# Altium PCB spectral_clock.PcbDoc
Units mm, origin at the board's own origin, x right, y up, seen from the top; angles counter-clockwise.
Board outline 35.5 x 62 mm, 2 copper layers (Top Layer, Bottom Layer); 71 components, 66 nets, 277 pads, 180 vias.
Unrouted connection lines stored in the file: 10.
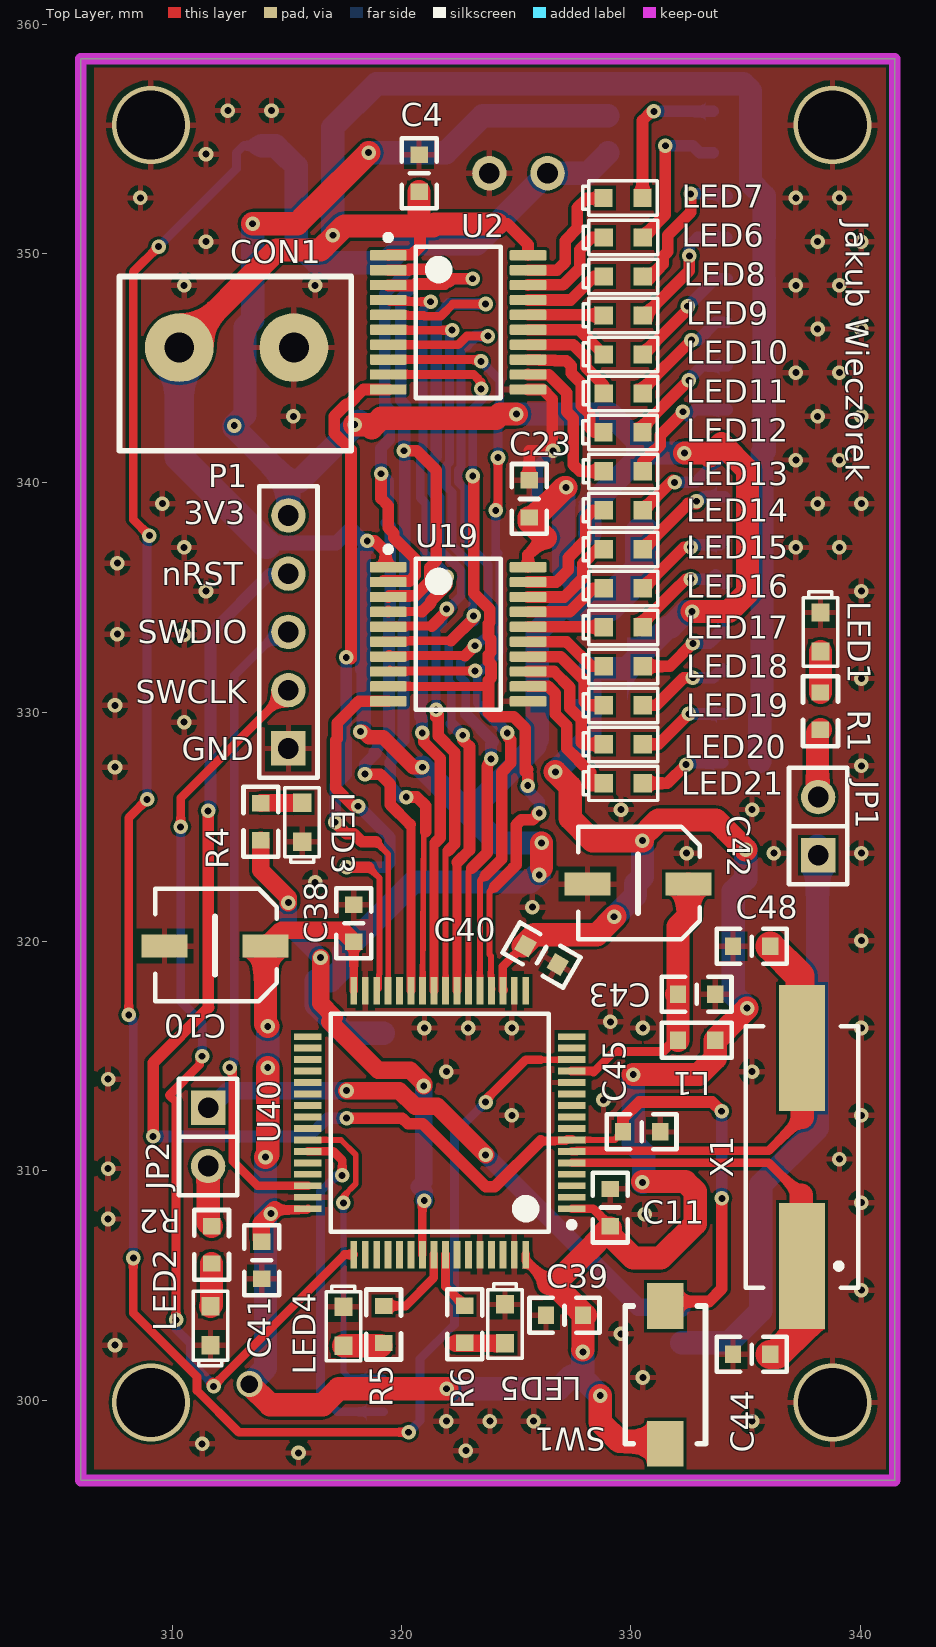
[diagram p0: Top Layer view]
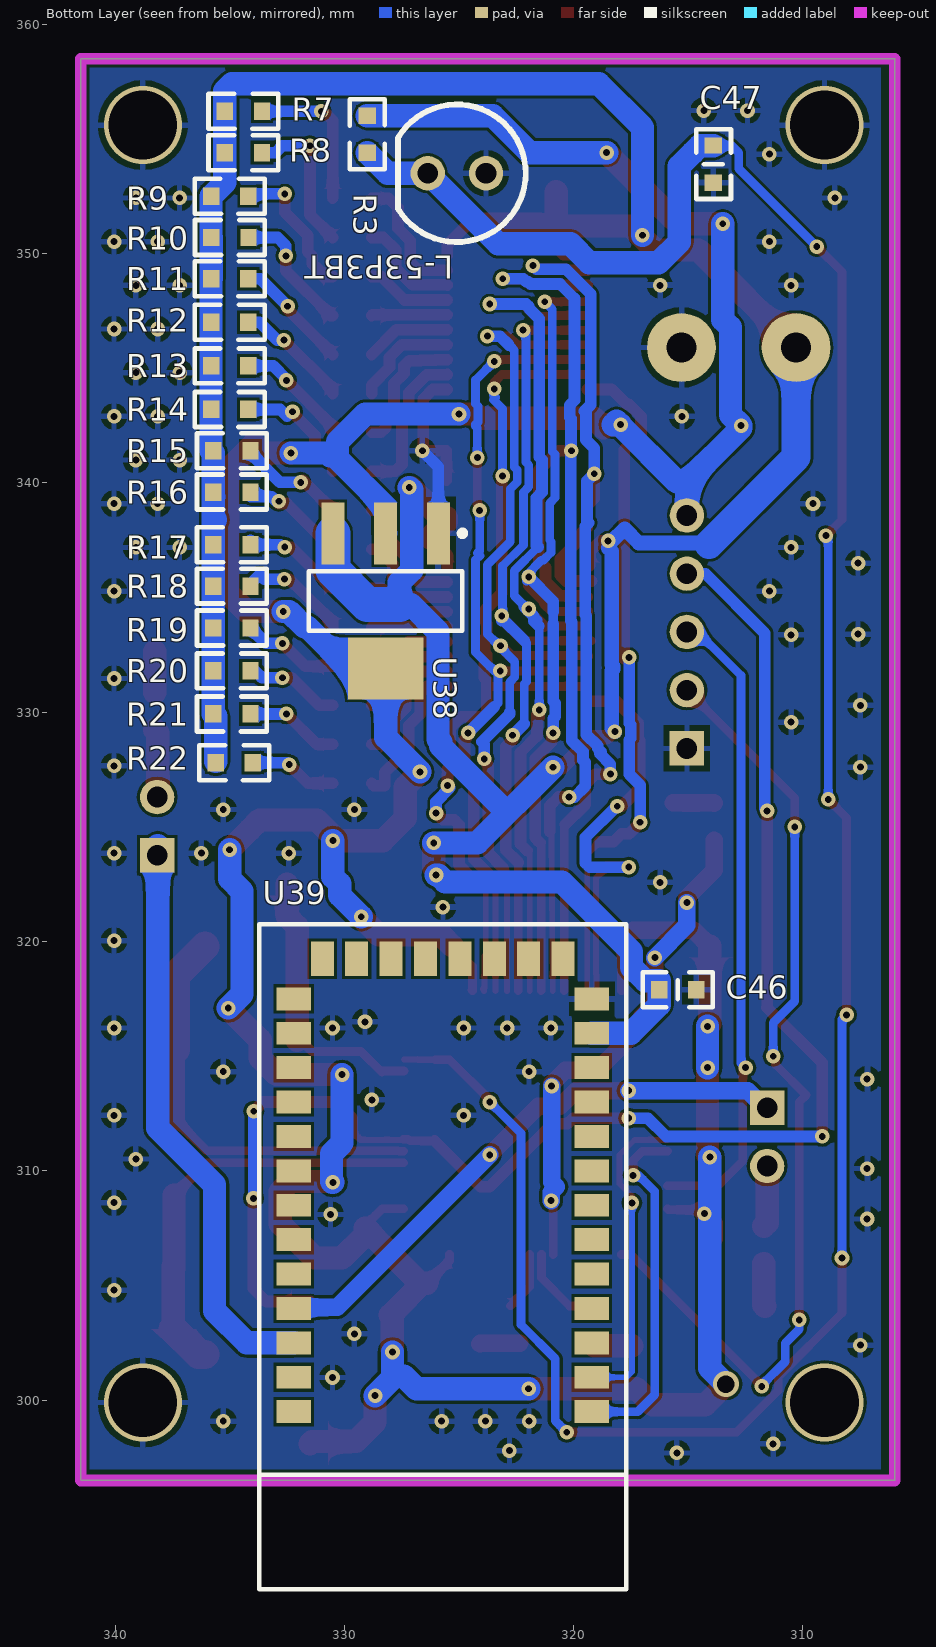
[diagram p1: Bottom Layer view, seen from below]
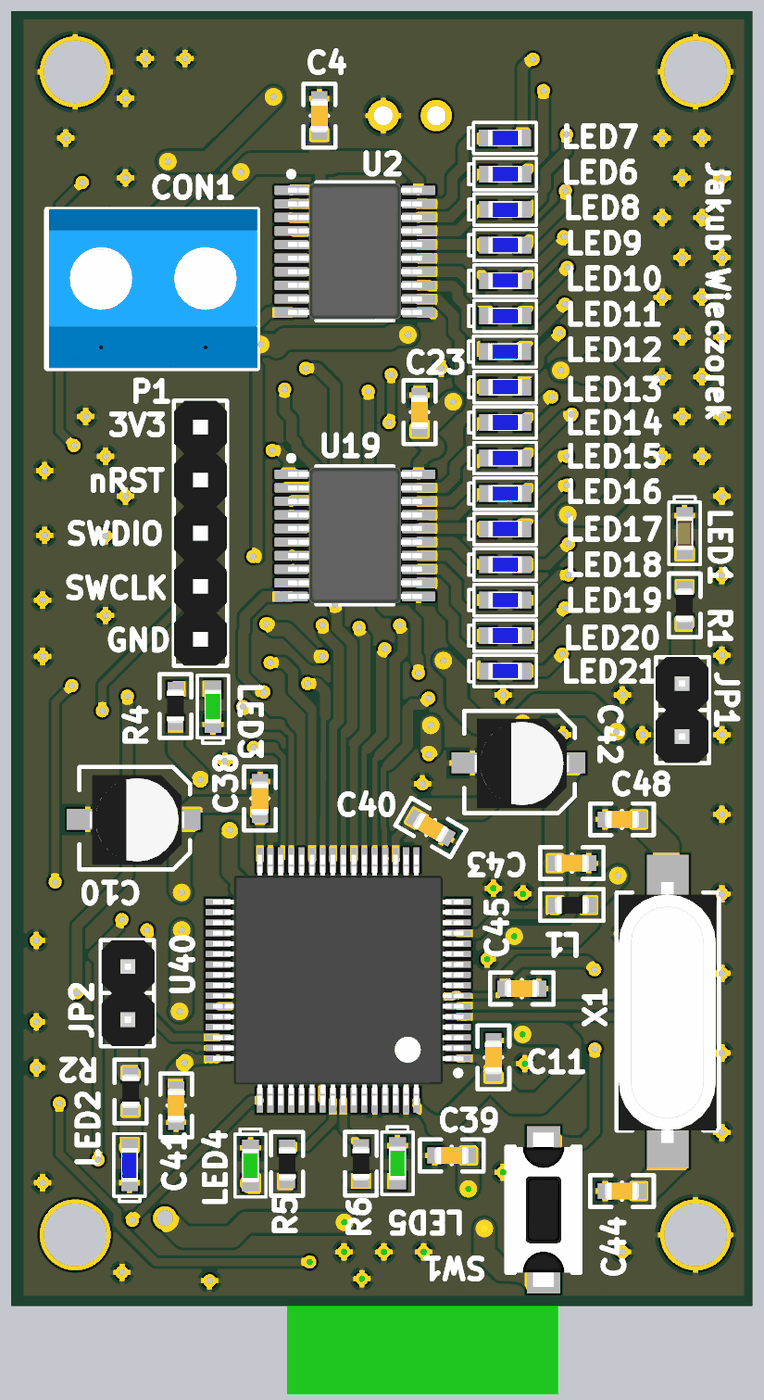
[diagram p2: 3D render of the assembled board from above, using the file's embedded part models]
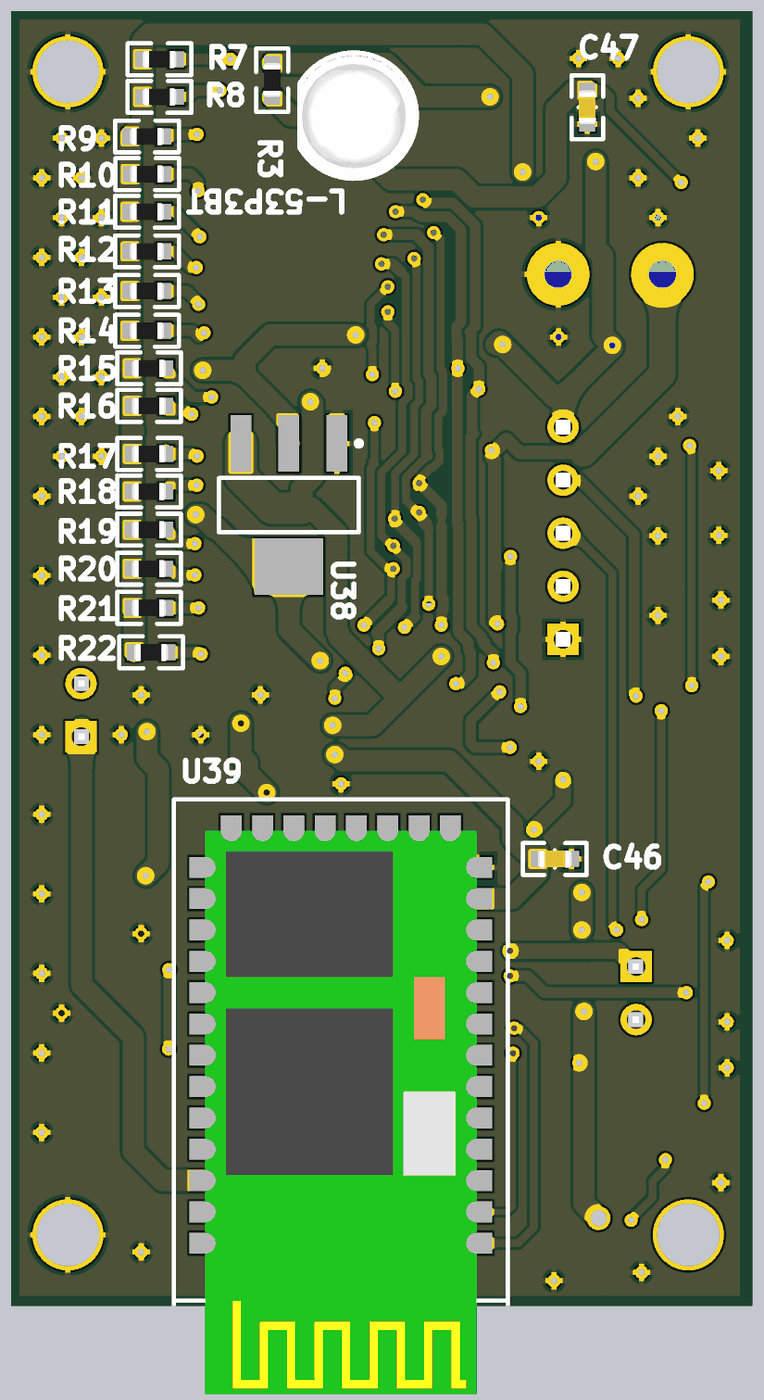
[diagram p3: 3D render of the assembled board from below, using the file's embedded part models]

## Layer stack, top to bottom
Top Solder: solder mask 0.0102, Solder Resist, Dk 3.5
Top Layer: signal copper 0.0356
Dielectric 1: dielectric 0.32, FR-4, Dk 4.8
Bottom Layer: signal copper 0.0356
Bottom Solder: solder mask 0.0102, Solder Resist, Dk 3.5

## Board outline
306,296.5 306,358.5 341.5,358.5 341.5,296.5

## Design rules (kind name [scope] priority, off if disabled: settings)
Clearance "Stitching GND" [IsStitchingVia and InNet('GND') vs (IsVia and (Not IsStitchingVia)) Or IsPad] p1: gap=0.127 ignorepadtopadclearanceinfootprint=FALSE
Clearance minimum_clearance [All] p2: gap=0.127 ignorepadtopadclearanceinfootprint=FALSE // minimum electrical clearance
DiffPairsRouting [All] p1: maxlimit=2.54 minlimit=0.127 mostfreqgap=0.254 toplayer_minwidth=0.127 toplayer_maxwidth=2.54 toplayer_prefwidth=0.762 bottomlayer_minwidth=0.127 bottomlayer_maxwidth=2.54 bottomlayer_prefwidth=0.762 maxuncoupledlength=12.7
HoleSize [All] p1: absolutevalues=TRUE maxlimit=6.5 minlimit=0.3 maxpercent=80.000 minpercent=20.000
MinimumAnnularRing [All] p1: minimumring=0.153
PolygonConnect [All] p1: connectstyle=Relief reliefconductorwidth=0.254 reliefentries=4 polygonreliefangle="90 Angle" airgapwidth=0.254
RoutingVias [All] p1: holewidth=1 width=1.45 viastyle="Through Hole" minholewidth=0.3 minwidth=0.45 maxholewidth=5 maxwidth=5.45
SilkToSilkClearance [All] p1: silktosilkclearance=0.125
SilkToSolderMaskClearance [IsPad] p1: minsilkscreentomaskgap=0.125 clearancetoexposedcopper=TRUE
SolderMaskExpansion [All] p1: expansion=0.102
UnRoutedNet [All] p1: checkbadconnections=TRUE
Width [All] p1: maxlimit=2.54 minlimit=0.127 preferedwidth=0.762 minimp=50.000000 maximp=50.000000 favimp=50.000000
25 further rules are at their usual default settings.

## Components (designator, comment, footprint, x,y, rotation, side; value= is the part's Value field where it differs from the comment)
C4 "Cap" 0603_CAP 320.761,353.5 r90 top value=100nF
C10 "1uF" Con_SMD_4x5 314.401,318.04 r270 top
C11 "Cap" 0603_CAP 329.1,308.4 r270 top value=100nF
C23 "Cap" 0603_CAP 325.561,339.3 r90 top value=100nF
C38 "Cap" 0603_CAP 317.911,320.8 r270 top value=100nF
C39 "Cap" 0603_CAP 327.1,303.7 r0 top value=100nF
C40 "Cap" 0603_CAP 326.1,319.408 r150 top value=100nF
C41 "Cap" 0603_CAP 313.9,306.1 r90 top value=100nF
C42 "1uF" Con_SMD_4x5 332.84,320.74 r270 top
C43 "Cap" 0603_CAP 332.861,317.703 r180 top value=100nF
C44 "Cap" 0603_CAP 335.261,302 r180 top value=20pF
C45 "Cap" 0603_CAP 330.461,311.7 r180 top value=100nF
C46 "Cap" 0603_CAP 315.461,317.9 r180 bottom value=100nF
C47 "Cap" 0603_CAP 313.9,353.9 r90 bottom value=500nF
C48 "Cap" 0603_CAP 335.261,319.8 r180 top value=20pF
CON1 "ARK2" ARK2 317.8,349 r180 top
JP1 "Jumper" "HDR1X2 - JP" 336.891,325.03 r90 top
JP2 "Jumper" "HDR1X2 - JP" 312.831,311.48 r270 top
L1 "10uH" 0603_IND 332.861,315.7 r180 top
L-53P3BT "Phototransistor" LED_THT 323.821,353.5 r0 bottom
LED1 "RED" 0603_led_red 338.261,333.496 r90 top
LED2 "BLUE" 0603_led_blue 311.661,303.25 r270 top
LED3 "=GREEN" 0603_led_green 315.661,325.2 r270 top
LED4 "RED" 0603_led_green 317.461,303.22 r90 top
LED5 "RED" 0603_led_green 324.505,303.326 r90 top
LED6 "RED" 0603_led_blue 329.651,352.425 r180 top
LED7 "RED" 0603_led_blue 329.661,350.7 r180 top
LED8 "RED" 0603_led_blue 329.661,349 r180 top
LED9 "RED" 0603_led_blue 329.661,347.3 r180 top
LED10 "RED" 0603_led_blue 329.661,345.6 r180 top
LED11 "RED" 0603_led_blue 329.661,343.9 r180 top
LED12 "RED" 0603_led_blue 329.651,342.2 r180 top
LED13 "RED" 0603_led_blue 329.661,340.5 r180 top
LED14 "RED" 0603_led_blue 329.661,338.8 r180 top
LED15 "RED" 0603_led_blue 329.661,337.1 r180 top
LED16 "RED" 0603_led_blue 329.661,335.4 r180 top
LED17 "RED" 0603_led_blue 329.661,333.7 r180 top
LED18 "RED" 0603_led_blue 329.661,332 r180 top
LED19 "RED" 0603_led_blue 329.661,330.3 r180 top
LED20 "RED" 0603_led_blue 329.661,328.6 r180 top
LED21 "RED" 0603_led_blue 329.661,326.9 r180 top
P1 "HDR1X5" HDR1X5 315.061,328.42 r90 top
R1 "470" 0603_RES 338.261,330.046 r90 top
R2 "470" 0603_RES 311.711,306.77 r270 top
R3 "100k" 0603_RES 329,355.2 r90 bottom
R4 "470" 0603_RES 313.861,325.225 r90 top
R5 "470" 0603_RES 319.211,303.3 r270 top
R6 "470" 0603_RES 322.752,303.31 r270 top
R7 "470" 0603_RES 334.4,356.2 r0 bottom
R8 "470" 0603_RES 334.4,354.4 r0 bottom
R9 "470" 0603_RES 335,352.5 r0 bottom
R10 "470" 0603_RES 334.99,350.7 r0 bottom
R11 "470" 0603_RES 335,348.9 r0 bottom
R12 "470" 0603_RES 335,347 r0 bottom
R13 "470" 0603_RES 335,345.1 r0 bottom
R14 "470" 0603_RES 335,343.2 r0 bottom
R15 "470" 0603_RES 334.9,341.4 r0 bottom
R16 "470" 0603_RES 334.9,339.6 r0 bottom
R17 "470" 0603_RES 334.9,337.3 r0 bottom
R18 "470" 0603_RES 334.9,335.5 r0 bottom
R19 "470" 0603_RES 334.9,333.672 r0 bottom
R20 "470" 0603_RES 334.9,331.8 r0 bottom
R21 "470" 0603_RES 334.9,329.924 r0 bottom
R22 "470" 0603_RES 334.8,327.8 r0 bottom
SW1 "Micro_Switch" "Tact 34N-F" 331.5,304.1 r180 top
U2 "TLC59210IPWR" PW0020A_M 322.461,347 r0 top
U19 "TLC59210IPWR" PW0020A_M 322.461,333.4 r0 top
U38 "LD1117AS33TR" SOT-223_M 328.2,334.85 r270 bottom
U39 "HC05" HC05 325.711,319.25 r0 bottom
U40 "STM32F103RBT6TR" STM-LQFP64_V 321.661,312.1 r180 top
X1 "" HC49/4H_SMX 337.458,310.6 r90 top value=8MHz

## Footprints (in the part's own frame and the unit in brackets; to place one, negate y for a bottom-side part, rotate by r counter-clockwise, add the part's x,y. Pads: shape width x height; smd on the part's side, far side on the other; paste and mask are expansions set on the pad)
0603_CAP [mil]
  rect 28x30 smd: 1(-31.89,0.14) 2(31.89,0.14)
  silkscreen extent -60,-30 60,30, body extent -32,-16 32,16, height 32
0603_IND [mil]
  rect 28x30 smd: 1(-31.89,0.14) 2(31.89,0.14)
  silkscreen extent -60,-30 60,30, body extent -32,-16 32,16, height 32
0603_led_blue [mm]
  rect 0.8x0.8 smd: 1(-0.85,0) 2(0.85,0)
  silkscreen extent -1.5,-0.75 1.75,0.75, body extent -0.8,-0.4 0.8,0.4, height 0.6
0603_led_green [mm]
  rect 0.8x0.8 smd: 1(-0.85,0) 2(0.85,0)
  silkscreen extent -1.5,-0.75 1.75,0.75, body extent -0.8,-0.4 0.8,0.4, height 0.6
0603_led_red [mm]
  rect 0.8x0.8 smd: 1(-0.85,0) 2(0.85,0)
  silkscreen extent -1.5,-0.75 1.75,0.75, body extent -0.8,-0.4 0.8,0.4, height 0.6
0603_RES [mil]
  rect 28x30 smd: 1(-31.89,0) 2(31.89,0)
  silkscreen extent -60,-30 60,30, body extent -32,-16 32,16, height 32
ARK2 [mm]
  round 3 hole 1.3: 1(2.5,3.1) 2(7.5,3.1)
  silkscreen extent 0,0 10.1,7.6, body extent 0,0 10,7.6, height 10
Con_SMD_4x5 [mm] "SMD electrolytic capacitor"
  rect 1x2 smd: 1(-1.76,-0.34) 2(-1.76,-4.74)
  silkscreen extent -4.26,-5.14 0.64,0.16, body extent -3.89,-4.64 0.42,-0.12, height 5.48
HC05 [mm] "Bluetooth to Serial Port Module"
  rect 1.5x1 smd: 1(-6.5,19.75) 2(-6.5,18.25) 3(-6.5,16.75) 4(-6.5,15.25) 5(-6.5,13.75) 6(-6.5,12.25) 7(-6.5,10.75) 8(-6.5,9.25) 9(-6.5,7.75) 10(-6.5,6.25) 11(-6.5,4.75) 12(-6.5,3.25) 13(-6.5,1.75) 22(6.5,1.75) 23(6.5,3.25) 24(6.5,4.75) 25(6.5,6.25) 26(6.5,7.75) 27(6.5,9.25) 28(6.5,10.75) 29(6.5,12.25) 30(6.5,13.75) 31(6.5,15.25) 32(6.5,16.75) 33(6.5,18.25) 34(6.5,19.75)
  rect 1x1.5 smd: 14(-5.25,0) 15(-3.75,0) 16(-2.25,0) 17(-0.75,0) 18(0.75,0) 19(2.25,0) 20(3.75,0) 21(5.25,0)
  silkscreen extent -8,-1.5 8,27.5, body extent -6.5,0 6.5,27, height 1.9
HC49/4H_SMX [mm]
  rect 5.5x2 smd: 1(-4.75,0) 2(4.75,0)
  silkscreen extent -5.7,-2.45 5.7,2.45, body extent -6.3,-2.3 6.2,2.35, height 3.9
"HDR1X2 - JP" [mm] "Connector; Header; 2 Position, Jumper"
  rect 1.5x1.5 hole 0.9: 1(-1.27,-1.27)
  round 1.5 hole 0.9: 2(1.27,-1.27)
  silkscreen extent -2.54,-2.54 2.54,0, body extent -2.54,-2.51 2.54,0.03, height 8.54
HDR1X5 [mm] "Connector; Header; 5 Position"
  rect 1.5x1.5 hole 0.9: 1(0,0)
  round 1.5 hole 0.9: 2(2.54,0) 3(5.08,0) 4(7.62,0) 5(10.16,0)
  silkscreen extent -1.27,-1.27 11.43,1.27, body extent -1.27,-1.27 11.43,1.27, height 8.54
LED_THT [mm] "Bended version of LED\Phototransistor"
  round 1.5 hole 0.9: 1(0,0) 2(2.54,0)
  silkscreen extent -1.73,-3 3.84,3, body extent -1.63,-2.87 3.77,2.93, height 8.99
PW0020A_M [mm] "SOP, 20-Leads, Body 6.6x4.5mm, Pitch 0.65mm, IPC Low Density"
  rrect22% 1.6x0.45 smd: 1(-3.05,2.925) 2(-3.05,2.275) 3(-3.05,1.625) 4(-3.05,0.975) 5(-3.05,0.325) 6(-3.05,-0.325) 7(-3.05,-0.975) 8(-3.05,-1.625) 9(-3.05,-2.275) 10(-3.05,-2.925) 11(3.05,-2.925) 12(3.05,-2.275) 13(3.05,-1.625) 14(3.05,-0.975) 15(3.05,-0.325) 16(3.05,0.325) 17(3.05,0.975) 18(3.05,1.625) 19(3.05,2.275) 20(3.05,2.925)
  silkscreen extent -3.17,-3.3 1.85,3.82, body extent -3.21,-3.25 3.21,3.25, height 1
SOT-223_M [mm] "SOT223, 4-Leads, Body 6.5x3.5mm, Pitch 2.3mm, Lead Span 7mm, IPC Low Density"
  rect 2.7x1 smd: 1(-2.95,2.3) 2(-2.95,0) 3(-2.95,-2.3)
  rect 2.7x3.3 smd: 4(2.95,0)
  silkscreen extent -3.07,-3.35 1.3,3.47, body extent -1.85,-3.35 1.85,3.35, height 1.8
STM-LQFP64_V [mm] "Thin QFP, 64-Leads, Body 10x10mm, Pitch 0.5mm, ST Recommended"
  rect 1.2x0.3 smd: 1(-5.75,3.75) 2(-5.75,3.25) 3(-5.75,2.75) 4(-5.75,2.25) 5(-5.75,1.75) 6(-5.75,1.25) 7(-5.75,0.75) 8(-5.75,0.25) 9(-5.75,-0.25) 10(-5.75,-0.75) 11(-5.75,-1.25) 12(-5.75,-1.75) 13(-5.75,-2.25) 14(-5.75,-2.75) 15(-5.75,-3.25) 16(-5.75,-3.75) 33(5.75,-3.75) 34(5.75,-3.25) 35(5.75,-2.75) 36(5.75,-2.25) 37(5.75,-1.75) 38(5.75,-1.25) 39(5.75,-0.75) 40(5.75,-0.25) 41(5.75,0.25) 42(5.75,0.75) 43(5.75,1.25) 44(5.75,1.75) 45(5.75,2.25) 46(5.75,2.75) 47(5.75,3.25) 48(5.75,3.75)
  rect 0.3x1.2 smd: 17(-3.75,-5.75) 18(-3.25,-5.75) 19(-2.75,-5.75) 20(-2.25,-5.75) 21(-1.75,-5.75) 22(-1.25,-5.75) 23(-0.75,-5.75) 24(-0.25,-5.75) 25(0.25,-5.75) 26(0.75,-5.75) 27(1.25,-5.75) 28(1.75,-5.75) 29(2.25,-5.75) 30(2.75,-5.75) 31(3.25,-5.75) 32(3.75,-5.75) 49(3.75,5.75) 50(3.25,5.75) 51(2.75,5.75) 52(2.25,5.75) 53(1.75,5.75) 54(1.25,5.75) 55(0.75,5.75) 56(0.25,5.75) 57(-0.25,5.75) 58(-0.75,5.75) 59(-1.25,5.75) 60(-1.75,5.75) 61(-2.25,5.75) 62(-2.75,5.75) 63(-3.25,5.75) 64(-3.75,5.75)
  silkscreen extent -5.87,-4.75 4.75,4.75, body extent -6,-6 6,6, height 1.6
"Tact 34N-F" [mm]
  rect 1.6x2 smd: 1(0,0) 2(0,6)
  silkscreen extent -1.75,0 1.75,6, body extent -1.75,-0.7 1.75,6.7, height 4.2

## Part data
C4 C11 C23 C38 C39 C40 C41 C43 C44 C45 C46 C47 C48: "Ceramic capacitor"
C10 C42: library part Cap_Pol, "Polar capacitor"
CON1: "Zlacze srubowe 2 piny"
JP1 JP2: library part Jumper_2, "Jumper, 2-Pin"
L1: library part Inductor, Code_IEC=1005, Code_JEITA=0402, LatestRevisionDate=29-May-2009, LatestRevisionNote="IPC-7351 Footprint Added.", PackageDescription="Chip Inductor", PackageReference=0402-A, Published=8-Jun-2000, Publisher="Altium Limited"
LED1 LED4 LED5 LED6 LED7 LED8 LED9 LED10 LED11 LED12 LED13 LED14 LED15 LED16 LED17 LED18 LED19 LED20 LED21: library part LED, "Light-emitting diode", COLOR=RED
LED2 LED3: library part LED, "Light-emitting diode", COLOR=RED
P1: "Header, 5-Pin", LatestRevisionDate=17-Jul-2002, LatestRevisionNote="Re-released for DXP Platform.", Publisher="Altium Limited"
R1 R2 R3 R4 R5 R6 R7 R8 R9 R10 R11 R12 R13 R14 R15 R16 R17 R18 R19 R20 R21 R22: library part RES, "Resistior"
SW1: "Switch", LatestRevisionDate=17-Jul-2002, LatestRevisionNote="Re-released for DXP Platform.", PackageReference=SPST-2, Published=24-Mar-1999, Publisher="Altium Limited"
U2 U19: library part CMP-0388-00401-2, "8-Bit DMOS Sink Driver with Latch, 3 to 5.5 V, -40 to 85 degC, 20-pin SOP (PW20), Green (RoHS & no Sb/Br)", Manufacturer="Texas Instruments", Code_JEDEC=MO-153, ComponentLink1Description="Manufacturer URL", ComponentLink1URL=http://www.ti.com/, ComponentLink2Description=Datasheet, ComponentLink2URL=http://www.ti.com/general/docs/lit/getliterature.tsp?genericPartNumber=TLC59210&fileType=pdf, ComponentLink3Description="Package Specification", ComponentLink3URL=http://www.ti.com.cn/cn/lit/ml/mpds362/mpds362.pdf, DatasheetVersion=SCLS711, Eco-Plan="Green (RoHS & no Sb/Br)", Mounting Technology="Surface Mount", PackageDescription="20-Pin Plastic Small Outline, Body 6.5 x 4.4 mm, 0.65 mm Pitch", PackageReference=PW0020A, PackageVersion=4040064-5/G, PartNumber=TLC59210IPWR, SubFamily="LED Driver", Vin(Max)(V)=5.5, Vin(Min)(V)=3
U38: library part CMP-0244-00316-1, "1A, Low Drop Positive Voltage Regulator, 3.3V, 4-Pin SOT-223, Tape and Reel", ComponentLink1Description="Manufacturer URL", ComponentLink1URL=http://www.st.com, ComponentLink2Description=Datasheet, ComponentLink2URL=http://www.st.com/internet/com/TECHNICAL_RESOURCES/TECHNICAL_LITERATURE/DATASHEET/CD00002116.pdf, DatasheetVersion=2/12/2011, PackageDescription="4-Pin SOT-223 Package, 6.5 x 3.5 mm Body, 2.3 mm Pitch, 7 mm Lead Span", PackageReference=SOT-223, PackageVersion=2010
U39: "Bluetooth to Serial Port Module"
U40: library part CMP-0237-00169-4, "ARM Cortex-M3 32-bit MCU, 128 KB Flash, 20 KB Internal RAM, 51 I/Os, 64-pin LQFP, -40 to 85 degC, Tape and Reel", I/Os (High Current)=51, Operating Frequency(F) (Processor speed) (MHz)=72, Supply Voltage(Vcc) min (V)=2, A/D Converter="2x12-bit (16 Channel)", ComponentLink1Description="Manufacturer URL", ComponentLink1URL=http://www.st.com/web/en/home.html, ComponentLink2Description=Datasheet, ComponentLink2URL=http://www.st.com/st-web-ui/static/active/en/resource/technical/document/datasheet/CD00161566.pdf, ComponentLink3Description="Package Specification", ComponentLink3URL=http://www.st.com/st-web-ui/static/active/en/resource/technical/document/datasheet/DM00037051.pdf, Core="ARM Cortex-M3", DatasheetVersion="Rev. 16", FLASH Size (Prog) (kB)=128, Internal RAM Size (kB)=20, Mounting Technology="Surface Mount", PackageDescription="64-Pin Low Profile Quad Flat Package, 10 x 10 mm Body, 0.5 mm Pitch", PackageReference=LQFP64, PackageVersion="Rev. 4, 06/2013", Packing="Tape and Reel", PartId=2, PartNumber=STM32F103RBT6TR
X1: library part XTAL, "Oscillator"

## Via types
v1: diameter 0.635, hole 0.3, Top Layer to Bottom Layer, 101 vias
v2: diameter 0.635, hole 0.305, Top Layer to Bottom Layer, 74 vias
v3: diameter 3.4, hole 3, Top Layer to Bottom Layer, 4 vias
v4: diameter 1.143, hole 0.762, Top Layer to Bottom Layer, 1 vias

## Nets (pads, with @x,y where several pads share a name; then routed paths per layer and width w, separated by ;. In a path a pad name is that pad's centre, name@x,y a point inside that pad or via, vN(x,y) a via of type N, cw(c..) or ccw(c..) an arc to the next point about the centre after c; other vN are vias at no path point)
3V3: C10.1 C11.2 C38.2 C39.2 C40.2 C41.2 L1.1 P1.5 R3.2 SW1.2 U38.2 U38.4 U40.1 U40.19 U40.32 U40.48 U40.64 | length 190.5
  Top Layer w0.254: U40.32 U40.32@317.915,317.853
  Top Layer w0.381: C41.2@313.871,307.035 C41.2@313.996,306.91 ; v1@314.465,308.303 315.865,308.303 U40.48 ; U40.32@317.915,317.853 C38.2 ; U40.19@324.444,317.882 U40.19 324.411,318.911 C40.2@325.3,319.8 ; U40.64 325.411,306.089 326.4,305.1 ; U40.1 328.35,308.35 C11.2@329.1,307.6
  Top Layer w0.762: C41.2@313.871,307.035 313.871,307.71 v1(314.3,308.139) v1@314.465,308.303 ; C10.1 314.761,320.5 317.405,320.5 C38.2
  Top Layer w1.016: v4(313.361,300.7) 314.261,299.8 316.561,299.8 317.261,300.5 v1(321.961,300.5) ; v1(313.5,351.3) 315.443,351.3 315.825,351.682 316.107,351.964 316.126,351.964 v1(318.561,354.4) ; v1(314.061,310.6) 314.161,310.7 v1(314.161,314.5) ; C10.1 314.061,316.4 v1(314.161,316.3) ; v1(317.955,342.539) 318.567,342.539 318.7,342.405 319.111,342.817 324.114,342.817 324.3,343.003 324.303,343 v1(325,343) ; C40.2@325.286,319.802 325.785,320.3 328.5,320.3 v1@329.3,321.1 ; 326.4,305.1 326.6,305.1 ; v1(326.7,327.4) 327.346,326.754 327.346,325.378 328.324,324.4 v1(330.5,324.4) 330.3,324.4 331.2,325.3 333.7,325.3 334.131,324.869 v1(335,324) ; v1@327.9,302.2 327.91,302.21 C39.2 ; C39.2@328,303.7 326.6,305.1 ; v1(328.661,300.2) 328.661,299.039 329.5,298.2 331.4,298.2 SW1.2 ; v1(330.1,314.2) 332.962,314.2 333.671,314.91 L1.1 v1@335.061,317.086 ; v1@330.5,309.533 332.367,309.533 332.8,309.1 332.8,307.7 331.3,306.2 330.1,306.2 329.1,307.2 329.1,307.5 326.7,305.1 326.6,305.1 ; v1(332.329,341.3) 333.32,341.3 333.434,341.186 333.948,341.7 335.076,340.572 335.076,335.2 334.266,334.39 v1(332.663,334.39)
  Bottom Layer w1.016: v4(313.361,300.7) 314.061,301.4 v1(314.061,310.6) ; v1(313.5,351.3) 313.5,347.119 313.165,346.784 313.165,342.965 v1(312.7,342.5) 312.7,342.4 315.061,340.039 ; v1(314.161,314.5) v1(314.161,316.3) ; P1.5 315.061,340.039 ; v1(317.955,342.539) v1@317.992,342.539 ; v1(318.561,354.4) 321.921,354.4 323.531,356.01 R3.2 ; v1(321.961,300.5) 326.851,300.5 327.406,301.055 327.806,301.055 ; v1(325,343) 329.085,343 329.089,343.003 330.3,341.792 ; v1(326.7,327.4) 328.2,328.9 U38.4 329.801,331.9 331.619,333.718 331.74,333.718 332.412,334.39 v1(332.663,334.39) ; v1(327.9,302.1) 327.9,301.148 327.806,301.055 ; U38.2 328.208,337.808 328.208,338.961 330.3,341.053 330.3,341.5 330.614,341.186 330.729,341.3 v1(332.329,341.3) ; v1(328.661,300.2) 327.806,301.055 ; v1(329.262,321.08) 330.2,322.018 330.2,322.524 330.5,322.824 v1(330.5,324.4) ; v1(330.1,314.2) 330.1,311.211 330.561,310.75 330.561,309.539 330.523,309.5 v1(330.5,309.5) ; v1(335,324) 335,322.738 334.461,322.2 334.461,317.7 v1(335.061,317.1) ; 315.061,340.039 315.492,340.039 317.973,342.52 v1@317.992,342.539 ; v1@317.992,342.539 318.281,342.539 318.137,342.683 v1@317.992,342.539
GND: C4.2 C10.2 C11.1 C23.2 C38.1 C39.1 C40.1 C41.1 C42.2 C43.1 C44.2 C45.1 C46.2 C47.1 C48.2 CON1.1 L-53P3BT.1 LED1.2 LED2.2 LED3.2 LED4.2 LED5.2 P1.1 U2.11 U19.11 U38.1 U39.13 U40.12 U40.18 U40.31 U40.47 U40.60 U40.63 | length 9.7
  Top Layer w0.508: U2.11 326.148,344.075 326.563,343.659 326.563,341.437 v1(326.6,341.4) 325.558,341.4 C23.2
  Bottom Layer w0.508: U38.1 325.9,340.7 v1(326.6,341.4)
  other v2: 315.5,297.7 322.8,297.8 311.3,298.1 321.945,299.085 323.85,299.085 325.755,299.085 335.28,299.085 330.517,300.99 307.5,302.4 329.565,302.895 340.042,304.8 307.2,307.9 330.6,308.1 340.042,308.61 307.2,310.1 339.09,310.515 324.803,312.42 340.042,312.42 328.8,313.1 307.2,314 321.945,314.325 335.28,314.325 320.993,316.23 322.897,316.23 324.803,316.23 330.517,316.23 340.042,316.23 329.1,316.5 340.042,320.04 325.7,321.5 316.23,322.58 332.423,323.85 336.232,323.85 340.042,323.85 329.565,325.755 335.28,325.755 307.5,327.6 340.042,327.66 310.515,329.565 307.5,330.3 340.042,331.47 310.515,333.375 307.6,333.4 311.467,335.28 340.042,335.28 307.6,336.5 310.515,337.185 337.185,337.185 339.09,337.185 309.562,339.09 338.137,339.09 340.042,339.09 337.185,340.995 339.09,340.995 315.277,342.9 338.137,342.9 340.042,342.9 337.185,344.805 339.09,344.805 338.137,346.71 340.042,346.71 310.515,348.615 316.23,348.615 337.185,348.615 339.09,348.615 311.467,350.52 338.137,350.52 340.042,350.52 308.61,352.425 337.185,352.425 339.09,352.425 311.467,354.33 312.42,356.235 314.325,356.235
  other v3: 338.788,299.9 309.061,355.6 338.788,355.6
NetC42_1: C42.1 C43.2 L1.2 U40.13 | length 11.9
  Top Layer w0.381: U40.13@327.4,314.35 U40.13 328.361,314.35 328.361,314.3 329.262,315.2 331.4,315.2 L1.2@331.7,315.5
  Top Layer w1.016: C43.2@332,317.7 332.047,317.653 332.047,315.7 L1.2 ; C43.2 332.051,320.651 332.5,321.1 C42.1
NetC44_1: C44.1 U40.5 X1.1 | length 18.6
  Top Layer w0.381: U40.5 329.254,310.35 329.262,310.358 336.003,310.358 337.428,308.933 ; X1.1@337.428,305.736 337.458,305.706 X1.1@337.565,305.599
  Top Layer w1.016: X1.1@337.428,305.736 337.428,308.933 ; X1.1@337.458,303.106 337.458,305.706 X1.1
  Top Layer w1.27: C44.1 336.348,301.996 X1.1@337.458,303.106
NetC47_2: C47.2 L-53P3BT.2 R3.1 U40.14 | length 110.4
  Top Layer w0.254: 326.061,314.85 U40.14
  Top Layer w0.381: v1(308.1,316.8) 308.1,325.4 v1(308.9,326.2) ; v1(308.3,306.2) 308.3,303.8 311.079,301.021 311.079,300.422 312.901,298.6 v1(320.3,298.6) ; v1(309,337.7) 308.3,338.4 308.3,349.2 v1(309.4,350.3) ; v1(323.661,313) 323.661,313.1 325.411,314.85 326.061,314.85
  Bottom Layer w0.381: v1(308.1,316.8) 308.3,316.6 v1(308.3,306.2) ; v1(308.9,326.2) 308.9,337.6 v1(309,337.7) ; v1(309.4,350.3) 312.8,353.7 312.8,354.4 313.1,354.7 C47.2@313.9,354.7 ; v1(320.3,298.6) 320.8,299.1 320.8,301.8 322.3,303.3 322.3,311.639 v1(323.661,313)
  Bottom Layer w1.016: C47.2@313.9,354.7 314.5,354.7 314.8,354.4 314.805,354.4 315.4,353.805 315.4,350.5 316.3,349.6 319.315,349.6 320.139,350.424 323.286,350.424 L-53P3BT.2 328.11,353.5 R3.1
NetC48_1: C48.1 U40.6 X1.2 | length 18.7
  Top Layer w0.381: U40.6@327.411,310.858 327.63,310.858 327.647,310.875 336.003,310.875 337.463,312.335
  Top Layer w1.016: 337.463,312.335 X1.2@337.463,315.201
  Top Layer w1.27: C48.1 337.371,318.496 337.371,315.293 X1.2@337.463,315.201
NetJP1_1: JP1.1 U39.32 | length 25.3
  Bottom Layer w1.016: U39.32 334.261,302.5 335.661,303.9 335.661,309.4 338.131,311.87 JP1.1@338.131,324.176
NetJP1_2: JP1.2 R1.1 | length 3
  Top Layer w1.016: JP1.2@338.131,326.3 338.131,329.106 R1.1
NetJP2_1: JP2.1 U39.31 | length 25
  Top Layer w0.762: JP2.1 JP2.1@311.611,312.7 ; v1(317.6,313.5) 319.904,313.5 320.593,312.811 321.55,312.811 v1(323.661,310.7)
  Bottom Layer w0.762: JP2.1 311.611,312.7 312.412,313.5 313.724,313.5 313.741,313.484 317.584,313.484 v1(317.6,313.5) ; v1(323.661,310.7) 330.311,304.05 332.161,304.05 U39.31
NetJP2_2: JP2.2 R2.1 | length 2.7
  Top Layer w1.016: JP2.2 311.561,307.73 R2.1
NetLED1_1: LED1.1 R1.2 | length 1.8
  Top Layer w1.016: R1.2 LED1.1
NetLED2_1: LED2.1 R2.2 | length 1.9
  Top Layer w1.016: LED2.1 311.711,304.15 R2.2
NetLED3_1: LED3.1 R4.2 | length 1.8
  Top Layer w0.762: R4.2 313.876,326.05 LED3.1
NetLED4_1: LED4.1 R5.2 | length 1.6
  Top Layer w1.016: LED4.1 R5.2@319.091,302.37
NetLED5_1: LED5.1 R6.2 | length 1.8
  Top Layer w0.762: 322.352,302.49 324.081,302.49 LED5.1@324.105,302.466
NetLED6_1: LED6.1 R7.1 | length 6.6
  Top Layer w0.508: LED6.1 330.501,355.801 330.9,356.2 v1(331,356.2)
  Bottom Layer w0.508: v1(331,356.2) R7.1
NetLED6_2: LED6.2 U2.19 | length 5.7
  Top Layer w0.508: U2.19 326.775,349.275 327.126,349.626 327.126,350.562 327.66,351.095 327.66,351.998 328.061,352.4 LED6.2@328.811,352.4
NetLED7_1: LED7.1 R8.1 | length 6.6
  Top Layer w0.508: LED7.1 331.5,351.688 v1(331.5,354.7)
  Bottom Layer w0.508: v1(331.5,354.7) 332.7,354.7 333,354.4 R8.1
NetLED7_2: LED7.2 U2.18 | length 4.6
  Top Layer w0.508: U2.18 325.511,348.64 327.038,348.64 327.761,349.363 327.761,350.161 328.3,350.7 LED7.2
NetLED8_1: LED8.1 R9.1 | length 6.3
  Top Layer w0.508: LED8.1 330.856,349 331.4,349.543 331.4,349.881 331.6,350.081 331.6,350.8 332.6,351.8 v1(332.6,352.6)
  Bottom Layer w0.508: v1(332.6,352.6) 334.09,352.6 R9.1
NetLED8_2: LED8.2 U2.17 | length 3.7
  Top Layer w0.508: U2.17 327.375,347.975 328.4,349 LED8.2
NetLED9_1: LED9.1 R10.1 | length 5.7
  Top Layer w0.508: LED9.1 330.6,347.3 332.547,349.247 v1(332.547,349.9)
  Bottom Layer w0.508: v1(332.547,349.9) 332.547,350.347 332.9,350.7 R10.1
NetLED9_2: LED9.2 U2.16 | length 3.3
  Top Layer w0.508: U2.16 328.787,347.325 LED9.2
NetLED10_1: LED10.1 R11.1 | length 5.1
  Top Layer w0.508: LED10.1 332.471,347.56 v1(332.471,347.7)
  Bottom Layer w0.508: v1(332.471,347.7) 333.671,348.9 R11.1
NetLED10_2: LED10.2 U2.15 | length 3.7
  Top Layer w0.508: U2.15 327.736,346.675 LED10.2
NetLED11_1: LED11.1 R12.1 | length 5.1
  Top Layer w0.508: LED11.1 330.511,344.099 v1(332.638,346.226)
  Bottom Layer w0.508: v1(332.638,346.226) 332.926,346.226 333.7,347 R12.1
NetLED11_2: LED11.2 U2.14 | length 4.6
  Top Layer w0.508: U2.14 327.488,346.025 328.03,345.483 328.03,345.042 328.811,344.261 LED11.2
NetLED12_1: LED12.1 R13.1 | length 5.1
  Top Layer w0.508: LED12.1 330.501,342.447 v1(332.524,344.469)
  Bottom Layer w0.508: v1(332.524,344.469) 332.524,344.524 333.1,345.1 R13.1
NetLED12_2: LED12.2 U2.13 | length 5.7
  Top Layer w0.508: U2.13 326.025,345.375 326.025,345.345 326.674,345.345 326.688,345.331 327.169,345.331 327.395,345.105 327.395,344.779 327.833,344.341 327.833,343.369 328.2,343.003 328.2,342.4 328.4,342.2 LED12.2
NetLED13_1: LED13.1 R14.1 | length 5.5
  Top Layer w0.508: LED13.1 330.511,340.911 331.019,341.419 331.059,341.419 331.282,341.642 331.282,342.083 332.259,343.06 v1(332.259,343.1)
  Bottom Layer w0.508: v1(332.259,343.1) 332.3,343.1 332.5,342.9 332.8,343.2 R14.1
NetLED13_2: LED13.2 U2.12 | length 6.7
  Top Layer w0.508: U2.12 325.511,344.71 326.411,344.71 327.198,343.922 327.198,343.106 327.488,342.817 327.488,340.788 327.777,340.5 LED13.2
NetLED14_1: LED14.1 R15.1 | length 4.7
  Top Layer w0.508: LED14.1 331.818,340.106 v1(331.9,340.024)
  Bottom Layer w0.508: v1(331.9,340.024) 332.814,340.024 R15.1@334.09,341.3
NetLED14_2: LED14.2 U19.19 | length 5.5
  Top Layer w0.508: U19.19 326.736,335.675 327.26,336.198 327.26,336.741 328.03,337.511 328.03,338.469 328.361,338.8 LED14.2
NetLED15_1: LED15.1 R16.1 | length 4.6
  Top Layer w0.508: LED15.1 332.499,339.088 332.485,339.101 332.501,339.101 332.499,339.103 332.87,339.103 332.857,339.117 v1(332.857,339.2)
  Bottom Layer w0.508: v1(332.857,339.2) 332.967,339.2 333.167,339.4 R16.1@334.08,339.4
NetLED15_2: LED15.2 U19.18 | length 4.5
  Top Layer w0.508: U19.18 327.086,335.025 327.895,335.833 327.895,336.478 328.517,337.1 LED15.2
NetLED16_1: LED16.1 R17.1 | length 4.2
  Top Layer w0.508: LED16.1 332.31,337.198 v1(332.6,337.198)
  Bottom Layer w0.508: v1@332.788,337.3 333.89,337.3 R17.1@334.09,337.5
NetLED16_2: LED16.2 U19.17 | length 3.7
  Top Layer w0.508: U19.17 327.336,334.375 328.361,335.4 LED16.2
NetLED17_1: LED17.1 R18.1 | length 4.8
  Top Layer w0.508: LED17.1 330.511,333.918 332.107,335.513 332.112,335.513 332.399,335.8 v1(332.614,335.8)
  Bottom Layer w0.508: v1(332.614,335.8) 333.49,335.8 333.69,336 R18.1@334.09,335.6
NetLED17_2: LED17.2 U19.16 | length 3.3
  Top Layer w0.508: U19.16 328.786,333.725 LED17.2
NetLED18_1: LED18.1 R19.1 | length 4.3
  Top Layer w0.508: LED18.1 331.7,332 v1(332.7,333)
  Bottom Layer w0.508: v1(332.7,333) 333.418,333 R19.1
NetLED18_2: LED18.2 U19.15 | length 3.7
  Top Layer w0.508: U19.15 327.14,333.075 327.155,333.06 327.199,333.06 328.259,332 LED18.2
NetLED19_1: LED19.1 R20.1 | length 4.3
  Top Layer w0.508: LED19.1 331.1,330.3 332.3,331.5 v1(332.7,331.5)
  Bottom Layer w0.508: v1(332.7,331.5) 333.59,331.5 333.99,331.9 R20.1
NetLED19_2: LED19.2 U19.14 | length 4.7
  Top Layer w0.508: U19.14 326.936,332.425 327.962,331.399 327.962,330.449 328.111,330.3 LED19.2
NetLED20_1: LED20.1 R21.1 | length 4.1
  Top Layer w0.508: LED20.1 331.2,328.6 v1(332.524,329.924)
  Bottom Layer w0.508: v1(332.524,329.924) R21.1
NetLED20_2: LED20.2 U19.13 | length 5.7
  Top Layer w0.508: U19.13 326.644,331.775 327.327,331.091 327.327,330.186 327.83,329.683 327.83,328.681 327.911,328.6 LED20.2
NetLED21_1: LED21.1 R22.1 | length 3.9
  Top Layer w0.508: LED21.1 331.585,326.9 v1(332.4,327.715)
  Bottom Layer w0.508: v1(332.4,327.715) 332.485,327.8 R22.1
NetLED21_2: LED21.2 U19.12 | length 6.6
  Top Layer w0.508: U19.12 326.396,331.125 326.692,330.828 326.692,329.923 327.195,329.42 327.195,328.418 327.648,327.965 327.7,327.965 327.7,327.913 328.235,327.378 328.235,326.8 328.711,326.8 LED21.2
NetR4_1: R4.1 U40.55 | length 22.2
  Top Layer w0.381: U40.55@320.895,306.35 320.895,308.609 v1(320.986,308.7)
  Top Layer w0.762: R4.1 313.861,323.1 315.061,321.9 v1(315.061,321.7) ; v1(316.461,319.3) 316.461,317.3 317.061,316.7 316.861,316.5 318.972,314.389 320.372,314.389 320.961,313.8 v1(320.961,313.7)
  Bottom Layer w0.762: v1(315.061,321.7) 315.061,320.7 v1(316.461,319.3) ; v1(320.961,313.7) 320.961,309.5 320.761,309.3 320.986,309.075 v1(320.986,308.7)
NetR5_1: R5.1 U40.56 | length 3.7
  Top Layer w0.381: R5.1 320.179,304.11 321.403,305.334 U40.56@321.403,306.35
NetR6_1: R6.1 U40.57 | length 2.6
  Top Layer w0.381: U40.57 321.911,304.96 R6.1
NetU2_2: U2.2 U19.2 U40.27 | length 44.7
  Top Layer w0.381: 320.361,325.103 320.411,325.053 U40.27
  Top Layer w0.508: v1(318.4,327.3) 319.061,327.3 319.501,326.859 319.501,325.963 320.361,325.103 ; v1(319.1,340.4) 319.1,339.321 319.421,339 319.421,338.049 319.661,337.809 319.661,337.609 320.592,336.678 320.592,335.971 320.34,335.719 U19.2@319.207,335.719 ; U2.2 320.301,349.275 320.334,349.308 321.618,349.308 v1(321.781,349.471)
  Bottom Layer w0.508: v1(318.4,327.3) 318.4,327.735 318.865,328.2 318.8,328.265 318.957,328.422 318.957,328.531 319.445,329.02 319.445,334.198 319.496,334.249 319.496,338.104 319.337,338.263 319.421,338.347 319.421,340.079 v1(319.1,340.4) 319.1,341.511 319.465,341.876 319.465,343.061 319.532,343.129 319.261,343.4 319.261,348.235 320.334,349.308 321.618,349.308 v1(321.781,349.471)
NetU2_3: U2.3 U19.3 U40.26 | length 49.2
  Top Layer w0.254: U40.26 320.961,324.8
  Top Layer w0.508: U19.3 319.455,335.069 320.34,335.069 320.355,335.084 320.603,335.084 321.227,335.708 321.227,336.31 321.515,336.598 321.515,340.546 320.662,341.4 v1(320.1,341.4) ; U2.3 319.426,348.61 320.534,348.61 320.597,348.673 321.881,348.673 321.981,348.773 322.07,348.773 322.197,348.9 v1(323.093,348.9) ; v1(320.2,326.3) 320.661,326.3 321.047,325.914 321.047,324.789
  Bottom Layer w0.508: v1(320.1,341.4) 320.1,342.798 ; v1(320.2,326.3) 319.962,326.3 319.498,326.763 319.498,327.811 319.592,327.904 319.592,328.268 320.08,328.757 320.08,333.935 320.131,333.986 320.131,342.767 320.1,342.798 ; v1(323.093,348.9) 322.197,348.9 322.07,348.773 321.981,348.773 321.881,348.673 320.597,348.673 319.961,348.037 319.961,343.598 320.167,343.392 320.167,342.866 320.1,342.798
NetU2_4: U2.4 U19.4 U40.25 | length 37.6
  Top Layer w0.254: 321.411,324.242 321.469,324.3
  Top Layer w0.381: U2.4 319.486,347.9 v1(321.261,347.9) ; U19.4@319.412,334.39 320.851,334.39 ; U40.25 321.411,324.242
  Top Layer w0.508: U19.4@319.411,334.389 U19.4@319.412,334.39 ; 320.851,334.39 320.897,334.39 321.262,334.755 321.262,334.845 321.961,335.543 v1(321.961,335.899) ; v1(320.899,329.099) 320.891,329.091 320.963,329.019 320.963,328.702 321.682,327.983 321.682,324.526 321.561,324.405 321.561,324.392 321.469,324.3
  Bottom Layer w0.381: 320.886,333.843 320.886,334.373 ; v1(321.261,347.9) 320.931,347.57 320.931,341.366 320.812,341.247 320.812,339.353 321.048,339.117 321.048,337.501 320.985,337.438 320.985,336.965 321.32,336.63 321.409,336.63 322.058,335.981 322.058,335.716 321.961,335.813 v1(321.961,335.899)
  Bottom Layer w0.508: 320.886,333.843 320.886,330.474 320.801,330.389 320.801,329.81 320.886,329.724 320.886,329.095 320.891,329.091 v1(320.899,329.099) ; 320.886,334.373 320.886,334.825 v1(321.961,335.899)
NetU2_5: U2.5 U19.5 U40.24 | length 43.1
  Top Layer w0.254: U40.24 321.911,323.844 322.033,323.965
  Top Layer w0.381: U19.5@319.411,333.754 321.305,333.754 ; U2.5 319.437,347.299 320.964,347.299 320.998,347.265 321.706,347.265 322.241,347.8 v1(323.661,347.8)
  Top Layer w0.508: 321.305,333.754 v1@322.006,334.454 ; v1(321.499,330.099) 321.499,329.786 321.598,329.884 321.598,328.965 322.321,328.242 322.321,324.253 322.033,323.965 ; v1(321.961,334.499) v1@322.05,334.499
  Bottom Layer w0.381: v1(321.499,330.099) 321.499,333.782 321.521,333.76 ; 321.556,337.201 322.596,336.162 322.596,335.074 321.556,334.035 321.556,333.795 321.804,334.042 321.804,334.163 v1@322.14,334.499
  Bottom Layer w0.508: 321.521,333.76 321.74,333.979 321.74,334.189 v1@322.15,334.599 ; 321.556,337.201 321.62,337.265 321.62,339.354 321.384,339.59 321.384,341.01 321.503,341.129 321.503,347.153 321.96,347.61 321.96,347.697 322.063,347.8 v1(323.661,347.8)
NetU2_6: U2.6 U19.6 U40.23 | length 38.1
  Top Layer w0.254: 322.411,323.446 322.419,323.454
  Top Layer w0.381: U19.6@319.207,333.119 322.15,333.119 ; U2.6@319.426,346.66 v1(322.201,346.66) ; U40.23 322.411,323.446
  Top Layer w0.508: 322.15,333.119 323.136,334.105 v1(323.136,334.2) ; 322.419,323.446 322.419,323.454 322.956,323.99 322.956,328.505 322.661,328.8 v1(322.661,328.995)
  Bottom Layer w0.381: 322.156,329.5 322.156,331.226 322.056,331.326 322.056,333.025 322.156,333.125 ; v1@322.191,346.65 322.082,346.54 322.082,340.9 321.955,340.773 321.955,339.827 322.191,339.59 322.191,337.285 323.104,336.372 323.104,334.534 323.083,334.513 v1@323.136,333.992
  Bottom Layer w0.508: 322.156,329.5 v1(322.661,328.995) ; 322.156,333.125 323.136,334.105 v1(323.136,334.2) v1@323.136,333.992 ; v1@322.191,346.65 v1(322.201,346.66)
NetU2_7: U2.7 U19.7 U40.22 | length 40
  Top Layer w0.254: U40.22 322.911,323.048 323.063,323.2
  Top Layer w0.381: U2.7 322.464,346.025 322.839,346.4 v1(323.761,346.4) ; U19.7@319.455,332.469 322.76,332.469
  Top Layer w0.508: U19.7@319.436,332.435 319.421,332.435 U19.7@319.455,332.469 ; 322.76,332.469 v1(323.191,332.9) ; 323.063,323.2 323.728,323.864 323.728,327.652 v1(323.897,327.966)
  Bottom Layer w0.381: 322.791,330 322.791,331.309 322.564,331.536 322.564,332.203 v1@323.191,332.83 ; 322.826,346.015 322.59,345.778 322.59,340.69 322.463,340.563 322.463,340.037 322.765,339.735 322.765,337.429 323.771,336.423 323.771,333.41 v1@323.191,332.83 ; v1(323.191,332.9) v1@323.191,332.83
  Bottom Layer w0.508: 322.791,330 322.791,329.924 323.999,328.716 323.897,328.614 v1(323.897,327.966) ; 322.826,346.015 323.211,346.4 v1(323.761,346.4)
NetU2_8: U2.8 U19.8 U40.21 | length 37.7
  Top Layer w0.254: U40.21 323.411,322.65 323.661,322.9
  Top Layer w0.381: U2.8 v1@323.386,345.375 ; U19.8@319.436,331.8 319.483,331.846 319.53,331.799 v1(323.199,331.799) ; v1(324.1,338.8) 324.2,338.9 v1(324.2,341.1)
  Top Layer w0.508: v1@323.386,345.375 v1(323.461,345.3) ; 323.661,322.9 324.363,323.601 324.363,327.389 324.76,327.786 324.76,328.801 v1@324.661,328.9
  Bottom Layer w0.381: 323.461,330.242 323.299,330.404 323.299,331.813 323.285,331.799 v1(323.199,331.799) 323.461,331.799 324.279,332.618 324.279,336.634 324.089,336.824 324.199,336.934 324.1,337.034 v1(324.1,338.8) ; v1(323.461,345.3) 324.279,344.482 324.279,343.446 324.175,343.342 324.175,342.658 324.279,342.553 324.279,342.485 324.2,342.405 v1(324.2,341.1)
  Bottom Layer w0.508: 323.461,330.242 v1(324.604,329.099)
NetU2_9: U2.9 U19.9 U40.20 | length 39
  Top Layer w0.254: U40.20 323.967,317.905 323.967,317.946 323.888,317.946 323.888,319.37 323.83,319.429 323.83,322.168 324.061,322.4
  Top Layer w0.381: U19.9 323.786,331.125 ; U2.9 323.136,344.725 323.461,344.4 v1(323.461,344.1) ; v1(323.098,340.3) v1@323.235,340.3
  Top Layer w0.508: v1@323.136,340.196 323.136,335.187 323.835,334.489 323.835,333.91 323.786,333.862 323.786,333.292 323.89,333.189 323.89,332.61 323.786,332.507 323.786,332.2 323.898,332.089 323.898,331.51 323.786,331.399 323.786,331.125 323.786,329.974 323.963,329.797 324.893,329.797 325.395,329.296 325.395,327.523 325.436,327.564 325.5,327.5 325.4,327.4 325.499,327.301 v1(325.499,326.799) ; 324.061,322.4 324.826,323.165 324.826,323.167 324.998,323.338 324.998,325.099 325.211,325.312 325.712,325.312 325.949,325.549 325.899,325.6 v1(326,325.6)
  Bottom Layer w0.381: v1(323.098,340.3) 323.098,343.221 323.499,343.623 323.4,343.722 323.5,343.822 323.461,343.861 v1(323.461,344.1)
  Bottom Layer w0.508: v1(325.499,326.799) v1(325.499,326.799) 325.398,326.7 326,326.098 v1(326,325.6)
NetU2_10: U2.10 U40.29 | length 30.3
  Top Layer w0.254: 318.878,324.35 319.411,323.816 U40.29
  Top Layer w0.508: v1(317.1,325.2) 317.1,325.18 317.58,324.7 317.915,324.7 318.265,324.35 318.878,324.35 ; v1(317.584,332.389) 317.734,332.389 317.792,332.331 317.792,341.444 317.066,342.17 317.066,342.907 317.587,343.428 317.689,343.428 318.336,344.075 U2.10
  Bottom Layer w0.508: v1(317.1,325.2) 317.1,326.812 317.584,327.295 317.584,328.787 317.504,328.867 317.504,329.445 317.584,329.525 v1(317.584,332.389)
NetU19_10: U19.10 U40.30 | length 18.4
  Top Layer w0.254: 318.556,323.244 319.03,322.77 319.03,318.578 319.007,318.555 319.007,317.946 U40.30
  Top Layer w0.508: v1(317.6,323.244) 318.556,323.244 ; v1(318.1,325.9) 317.9,325.9 317.121,326.679 317.121,328.78 317.186,328.845 317.186,329.53 317.727,330.071 318.131,330.475 U19.10
  Bottom Layer w0.508: v1(317.6,323.244) 319.305,323.244 319.486,323.424 319.486,324.543 318.128,325.9 v1(318.1,325.9)
NetU39_1: U39.1 U40.43 | length 15.5
  Top Layer w0.381: U40.43 317.012,310.85 317.405,310.456 v1(317.405,309.8)
  Bottom Layer w0.381: v1(317.405,309.8) 317.16,309.8 316.461,309.101 316.461,300.239 317.2,299.5 U39.1
NetU39_2: U39.2 U40.42 | length 13.9
  Top Layer w0.254: U40.42 317.35,311.35 318,310.7 318,309.439 317.461,308.9 v1(317.461,308.6)
  Bottom Layer w0.254: v1(317.461,308.6) 317.461,301.239 317.7,301 U39.2
nRST: C45.2 P1.4 SW1.1 U40.7 | length 66.4
  Top Layer w0.254: U40.7 329.305,311.35 C45.2
  Top Layer w0.381: 326.061,311.3 326.662,311.3 326.662,311.317 327.152,311.317 327.217,311.382 U40.7@327.436,311.382
  Top Layer w0.508: v1(309.161,311.5) 309.161,314.711 311.575,317.125 311.561,317.138 v1(311.561,325.7) ; v1(317.6,312.3) 320.026,312.3 320.278,312.049 320.912,312.049 323.661,309.3 324.061,309.3 326.061,311.3 ; C45.2 329.651,312.29 330.361,313 333.55,313 v1(333.95,312.6) ; SW1.1@331.5,304.3 333.4,304.3 333.961,304.861 v1(333.961,308.8)
  Bottom Layer w0.508: v1(309.161,311.5) 315.961,311.5 316.762,312.3 v1(317.6,312.3) ; v1(311.561,325.7) 311.661,325.8 311.661,333.45 314.251,336.04 P1.4 ; v1(333.95,312.6) 333.95,308.811 v1(333.961,308.8)
SWCLK: P1.2 U40.49 | length 43.2
  Top Layer w0.381: v1(310.161,303.5) 310.161,313 309.861,313.3 311.2,314.638 311.2,315.039 311.24,314.999 v1(311.299,314.999) ; v1(310.361,325) 310.361,326.26 P1.2 ; v1(311.799,300.6) v1@311.799,300.638 ; U40.49 317.511,306.35 v1@311.799,300.638 ; v1@311.799,300.638 311.761,300.6 311.661,300.7 311.761,300.799 311.799,300.761 v1@311.799,300.638
  Bottom Layer w0.381: v1(310.161,303.5) 310.161,303.1 310.779,302.482 310.779,301.682 311.799,300.662 v1(311.799,300.6) ; v1(310.361,325) 310.361,317.4 311.3,316.461 v1@311.3,315.2 ; v1(311.299,314.999) v1@311.299,315.199
SWDIO: P1.3 U40.46 | length 28.2
  Top Layer w0.381: v1(312.5,314.5) 312.629,314.371 312.629,310.432 313.711,309.35 U40.46
  Bottom Layer w0.381: v1(312.5,314.5) 312.7,314.7 312.7,331.6 314.6,333.5 P1.3
VCC: C4.1 C23.1 C46.1 CON1.2 R7.2 R8.2 R9.2 R10.2 R11.2 R12.2 R13.2 R14.2 R15.2 R16.2 R17.2 R18.2 R19.2 R20.2 R21.2 R22.2 U2.1 U2.20 U19.1 U19.20 U38.3 U39.12 | length 155.2
  Top Layer w0.508: v1(318.499,337.468) 318.832,337.468 319.3,337 U19.1@319.3,336.4 ; U19.1@319.382,336.354 U19.1@319.411,336.354 ; U2.1 319.43,349.943 320.443,349.943 320.8,350.3 320.8,351 ; 324.2,351.3 324.6,351.3 325.511,350.389 U2.20 ; U19.20 325.511,336.859 326.257,337.604 ; v1(326,322.9) 326.1,323 326.1,323.244
  Top Layer w0.635: v1(318.202,329.156) 318.302,329.156 318.558,328.9 319.199,328.9 320.499,327.6 v1(320.9,327.6)
  Top Layer w1.016: CON1.2 314.557,350.157 316.457,350.157 316.739,350.439 ; 316.6,350.3 317.503,351.203 320.758,351.203 ; 320.758,351.29 C4.1 ; 320.8,351.2 321.362,351.2 321.451,351.29 324.146,351.29 ; C23.1 325.79,338.49 327.1,339.8 v1(327.169,339.8) ; C23.1@325.641,338.303 325.558,338.303 326.257,337.604 ; 326.1,323.244 v1(326.1,324.3)
  Bottom Layer w0.508: v1@318.499,337.16 v1(318.499,337.468)
  Bottom Layer w0.635: 314.1,337.321 314.156,337.378 317.156,337.378 317.779,338 318.311,337.468 v1(318.499,337.468) ; v1(318.202,329.156) 318.346,329.3 318.346,331.807 318.282,331.871 318.282,332.01 318.346,332.073 318.346,332.723 318.346,337.007 v1@318.499,337.16
  Bottom Layer w1.016: v1(317,350.8) 317,355.5 318.9,357.4 334.9,357.4 335.21,357.09 R7.2 R8.2 335.21,353.1 R9.2 335.81,350.71 R10.2 335.8,348.91 R11.2 R12.2 R13.2 R14.2 335.81,341.4 335.71,341.3 R16.2 335.71,339.41 335.7,339.4 335.71,339.39 335.71,338.3 ; U39.12 317.511,316 316.271,317.24 C46.1 316.271,318.284 316.882,318.284 317.477,318.879 317.477,319.551 320.526,322.6 325.6,322.6 325.9,322.9 v1(326,322.9) ; v1(320.9,327.6) 324.2,324.3 v1(326.1,324.3) ; 322.939,325.661 325.8,328.522 325.8,328.7 325.915,328.815 325.915,333.513 327.102,334.7 327.6,334.7 327.6,335.652 327.057,336.195 327.057,339.073 327.065,339.081 327.065,339.696 v1(327.169,339.8) ; R22.2@335.61,327.849 335.61,329.824 R21.2 R20.2 R19.2 R17.2 335.71,338.3 ; 335.621,338.389 335.71,338.3
  Bottom Layer w1.27: CON1.2 310.3,341.121 314.1,337.321
  Bottom Layer w1.524: 327.6,334.7 329,334.7 330.5,336.2 U38.3
pads on no net: U39.3 U39.4 U39.5 U39.6 U39.7 U39.8 U39.9 U39.10 U39.11 U39.14 U39.15 U39.16 U39.17 U39.18 U39.19 U39.20 U39.21 U39.22 U39.23 U39.24 U39.25 U39.26 U39.27 U39.28 U39.29 U39.30 U39.33 U39.34 U40.2 U40.3 U40.4 U40.8 U40.9 U40.10 U40.11 U40.15 U40.16 U40.17 U40.28 U40.33 U40.34 U40.35 U40.36 U40.37 U40.38 U40.39 U40.40 U40.41 U40.44 U40.45 U40.50 U40.51 U40.52 U40.53 U40.54 U40.58 U40.59 U40.61 U40.62
copper on no net:
  other v3: 309.061,299.9

## Polygon pours and split planes (outlines as drawn)
GND on Top Layer "GND_L01_P002" (solid, remove dead copper, pour order 2): 306.6,358.1 306.6,296.99 341.15,296.99 341.15,358.1 306.6,358.1
GND on Bottom Layer "GND_L02_P004" (solid, remove dead copper, pour order 4): 306.6,358.1 306.6,296.99 341.15,296.99 341.15,358.1

## Keep-outs
Keep-Out Layer:
  the board outline again, w0.508

## Silkscreen, mask and mechanical layers (free items; w line width, h text height)
Top Overlay:
  text "Jakub Wieczorek" at 339.361,351.441 h1 r270
  text "3V3" at 310.5,338.2 h1
  text "nRST" at 309.534,335.543 h1
  text "SWDIO" at 308.481,333 h1
  text "SWCLK" at 308.4,330.4 h1
  text "GND" at 310.4,327.9 h1